# Altium PCB NBP7 Xilinx Virtex-II BGA456 Rev1.10.PcbDoc (part 3 of 3)
Units mm, origin at the board's own origin, x right, y up, seen from the top; angles counter-clockwise.
Board outline 69 x 80.99 mm, 6 copper layers (Top Layer, MidLayer1, InternalPlane1, InternalPlane2, MidLayer2, Bottom Layer); 101 components, 273 nets, 963 pads, 545 vias.
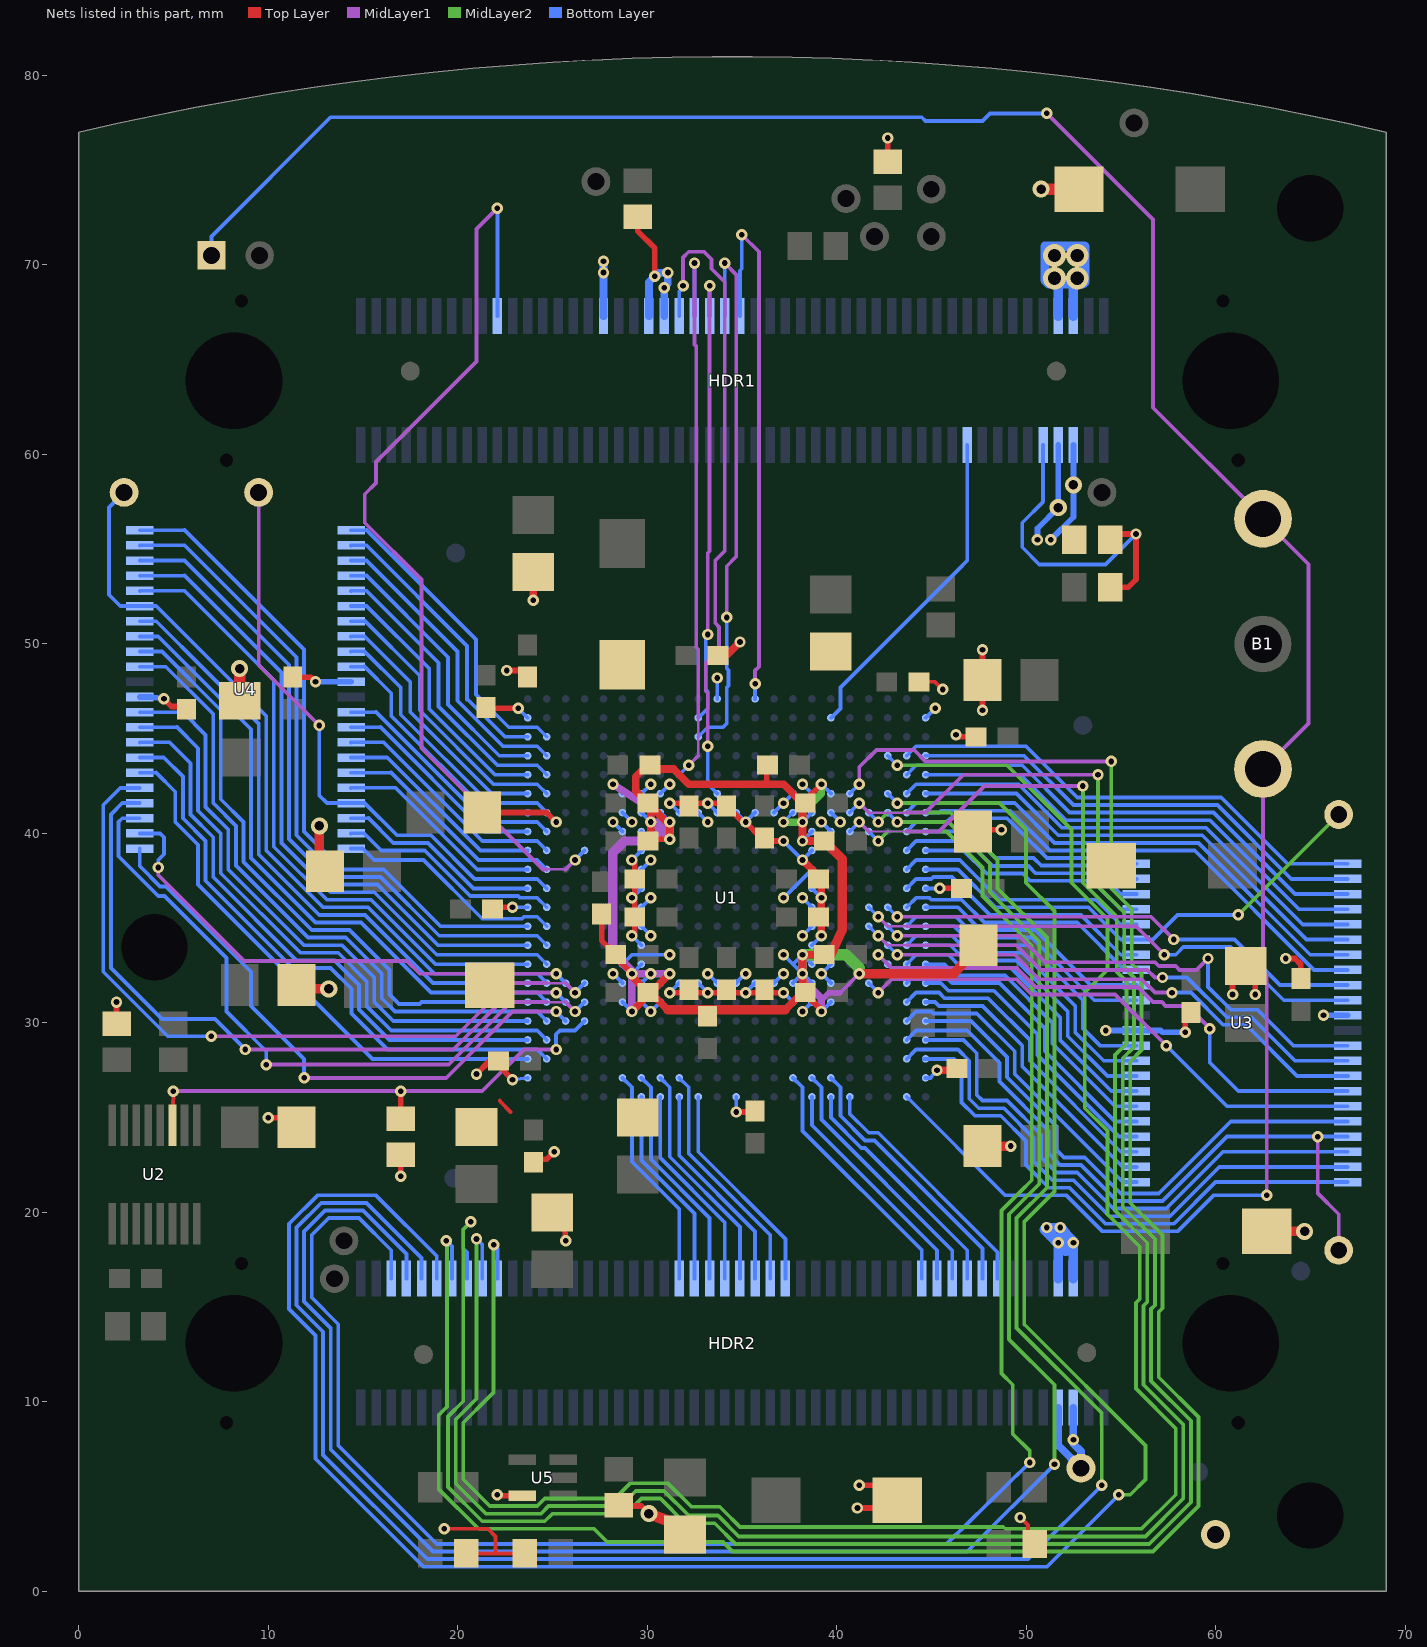
[diagram p7: the nets of this part, all layers, seen from the top]

## Via types
v1: diameter 0.6, hole 0.3, Top Layer to Bottom Layer, tented bottom, 520 vias
v2: diameter 0.9, hole 0.5, Top Layer to Bottom Layer, 17 vias
v3: diameter 1.2, hole 0.7, Top Layer to Bottom Layer, 8 vias

## Nets (pads, with @x,y where several pads share a name; then routed paths per layer and width w, separated by ;. In a path a pad name is that pad's centre, name@x,y a point inside that pad or via, vN(x,y) a via of type N, cw(c..) or ccw(c..) an arc to the next point about the centre after c; other vN are vias at no path point) (continued)
SP10: HDR2.86 U1.A18 | length 13.1
  Bottom Layer w0.2: U1.A18@40.7,26.1 40.7,25.2 41.7,24.2 42.2,24.2 48.5,17.9 HDR2.86@48.5,16.5
SP11: HDR2.84 U1.B17 | length 14.2
  Bottom Layer w0.2: U1.B17@39.7,27.1 40.2,26.6 40.2,25.1 41.5,23.8 42,23.8 47.7,18.1 HDR2.84@47.7,16.5
SP12: HDR2.82 U1.A17 | length 12.7
  Bottom Layer w0.2: U1.A17@39.7,26.1 39.7,25 41.3,23.4 41.5,23.4 46.9,18 HDR2.82@46.9,16.5
SP13: HDR2.80 U1.B16 | length 13.7
  Bottom Layer w0.2: U1.B16@38.7,27.1 39.2,26.6 39.2,24.9 46.1,18 HDR2.80@46.1,16.5
SP14: HDR2.78 U1.A16 | length 12.3
  Bottom Layer w0.2: U1.A16@38.7,26.1 38.7,24.6 45.3,18 HDR2.78@45.3,16.5
SP15: HDR2.76 U1.B15 | length 13.4
  Bottom Layer w0.2: U1.B15@37.7,27.1 38.2,26.6 38.2,24.3 44.5,18 HDR2.76@44.5,16.5
SPI_CLK: HDR1.46 U1.V9 | length 30.3
  MidLayer1 w0.127: 32.7,44.1 32.7,46.1
  MidLayer1 w0.2: v1(32.2,43.6) 32.7,44.1 ; v1(32.5,70.1) 32.5,65.8 32.6,65.7 32.6,49.8 32.7,49.7 32.7,46.1
  Bottom Layer w0.2: U1.V9@31.7,43.1 v1(32.2,43.6) ; HDR1.46@32.5,67.3 v1(32.5,70.1)
SPI_DIN: HDR1.44 U1.U11 | length 34.3
  MidLayer1 w0.2: v1(31.9,68.9) 31.9,70.4 32.2,70.7 33,70.7 33.4,70.3 33.4,69.8 34.1,69.1 34.1,54.9 33.6,54.4 33.6,51.1 33.8,50.9 33.8,49.7 33.1,49 33.1,47.5 33.2,47.4 v1(33.2,44.6)
  Bottom Layer w0.2: HDR1.44@31.7,67.3 31.7,68.6 31.9,68.8 v1(31.9,68.9) ; v1(33.2,44.6) 33.2,42.6 U1.U11@33.7,42.1
SPI_DOUT: HDR1.50 U1.Y10 | length 29.8
  MidLayer1 w0.2: v1(34.2,51.4) 34.2,54.1 34.7,54.6 34.7,69.5 v1@34.15,70.05 ; v1(34.1,70.1) v1@34.15,70.05 ; v1(34.1,70.1) 34.2,70.1 v1@34.15,70.05 ; v1(34.1,70.1) 34.1,70 v1@34.15,70.05
  Bottom Layer w0.2: U1.Y10@32.7,45.1 33.2,45.6 34,45.6 34.2,45.8 34.2,47.7 34.3,47.8 34.3,48.6 34.2,48.7 v1(34.2,51.4) ; HDR1.50@34.1,67.3 v1(34.1,70.1)
SPI_MODE: HDR1.52 U1.AB13 | length 29.4
  MidLayer1 w0.2: v1@34.9,71.6 34.95,71.65 v1(35,71.6) 35.9,70.7 35.9,48.8 35.7,48.6 v1(35.7,47.9)
  Bottom Layer w0.2: HDR1.52@34.9,67.3 34.9,69.7 35,69.8 v1(35,71.6) ; U1.AB13@35.7,47.1 v1(35.7,47.9)
SPI_SEL: HDR1.48 U1.AA10 | length 24.8
  MidLayer1 w0.2: v1(33.2,50.5) 33.2,54.8 33.3,54.9 v1(33.3,68.9)
  Bottom Layer w0.2: U1.AA10@32.7,46.1 33.2,46.6 33.2,47.5 33.1,47.6 33.1,50.5 v1(33.2,50.5) ; HDR1.48@33.3,67.3 v1(33.3,68.9)
SRAM0_A0: U1.G21 U3.5 | length 16.3
  Bottom Layer w0.2: U1.G21@43.7,32.1 44.2,32.6 45.6,32.6 46.1,32.1 48.6,32.1 51,29.7 51,28.5 54.7,24.8 U3.5@55.825,24.8
SRAM0_A1: U1.G22 U3.4 | length 15.1
  Bottom Layer w0.2: U1.G22@44.7,32.1 45.5,32.1 45.9,31.7 48.3,31.7 50.6,29.4 50.6,28.3 54.9,24 U3.4@55.825,24
SRAM0_A2: U1.F21 U3.3 | length 16.5
  Bottom Layer w0.2: U1.F21@43.7,31.1 44.2,31.6 45.4,31.6 45.7,31.3 48,31.3 50.2,29.1 50.2,28 55,23.2 U3.3@55.825,23.2
SRAM0_A3: U1.F22 U3.2 | length 15.4
  Bottom Layer w0.2: U1.F22@44.7,31.1 45.2,31.1 45.4,30.9 47.7,30.9 49.8,28.8 49.8,27.7 55.1,22.4 U3.2@55.825,22.4
SRAM0_A4: U1.E21 U3.1 | length 16.8
  Bottom Layer w0.2: U1.E21@43.7,30.1 44.2,30.6 45,30.6 45.1,30.5 47.4,30.5 49.4,28.5 49.4,27.3 55.1,21.6 U3.1@55.825,21.6
SRAM0_A5: U1.C22 U3.44 | length 28.7
  Bottom Layer w0.2: U1.C22@44.6,28.1 U1.C22@44.7,28.1 46.2,28.1 46.6,27.7 46.6,25.8 47.3,25.1 48.669,25.1 50,23.769 50,22.5 51.2,21.3 52.3,21.3 54.2,19.4 57.8,19.4 60,21.6 U3.44@66.975,21.6
SRAM0_A6: U1.C21 U3.43 | length 30.1
  Bottom Layer w0.2: U1.C21@43.7,28.1 44.2,28.6 46.4,28.6 47,28 47,26 47.5,25.5 48.834,25.5 50.4,23.934 50.4,22.7 51.4,21.7 52.5,21.7 54.4,19.8 57.6,19.8 60.2,22.4 U3.43@66.975,22.4
SRAM0_A7: U1.D22 U3.42 | length 29.2
  Bottom Layer w0.2: U1.D22@44.7,29.1 46.7,29.1 47.4,28.4 47.4,26.2 47.7,25.9 49,25.9 50.8,24.1 50.8,22.9 51.6,22.1 52.7,22.1 54.6,20.2 57.4,20.2 60.4,23.2 U3.42@66.975,23.2
SRAM0_A8: U1.N21 U3.18 | length 13.7
  Bottom Layer w0.2: U1.N21@43.7,38.1 44.2,38.6 46.5,38.6 48.6,36.5 53.7,36.5 55,35.2 U3.18@55.825,35.2
SRAM0_A9: U1.U21 U3.27 | length 26.5
  Bottom Layer w0.2: U1.U21@43.7,42.1 44.2,42.6 49.6,42.6 51.9,40.3 59.5,40.3 64.6,35.2 U3.27@66.975,35.2
SRAM0_A10: U1.V22 U3.26 | length 25.2
  Bottom Layer w0.2: U1.V22@44.7,43.1 49.7,43.1 52.1,40.7 59.7,40.7 64.4,36 U3.26@66.975,36
SRAM0_A11: U1.V21 U3.25 | length 26.3
  Bottom Layer w0.2: U1.V21@43.7,43.1 44.2,43.6 49.8,43.6 52.3,41.1 59.9,41.1 64.2,36.8 U3.25@66.975,36.8
SRAM0_A12: U1.W22 U3.24 | length 25
  Bottom Layer w0.2: U1.W22@44.7,44.1 49.9,44.1 52.5,41.5 60.1,41.5 64,37.6 U3.24@66.975,37.6
SRAM0_A13: U1.W21 U3.23 | length 26.1
  Bottom Layer w0.2: U1.W21@43.7,44.1 44.2,44.6 50,44.6 52.7,41.9 60.3,41.9 63.8,38.4 U3.23@66.975,38.4
SRAM0_A14: U1.R21 U3.22 | length 13.4
  Bottom Layer w0.2: U1.R21@43.7,40.1 44.2,40.6 ; 44.2,40.6 45.8,40.6 46,40.8 49,40.8 49.693,40.107 51.1,38.7 54.7,38.7 55,38.4 U3.22@55.825,38.4
SRAM0_A15: U1.R22 U3.21 | length 12.2
  Bottom Layer w0.2: U1.R22@44.7,40.1 47,40.1 48.4,38.7 50.4,38.7 50.8,38.3 54.3,38.3 55,37.6 U3.21@55.825,37.6
SRAM0_A16: U1.P21 U3.20 | length 13.5
  Bottom Layer w0.2: U1.P21@43.7,39.1 44.2,39.6 46.9,39.6 48.222,38.278 50.122,38.278 50.5,37.9 53.9,37.9 55,36.8 U3.20@55.825,36.8
SRAM0_A17: U1.P22 U3.19 | length 12.4
  Bottom Layer w0.2: U1.P22@44.7,39.1 46.7,39.1 47.922,37.878 49.822,37.878 50.2,37.5 53.5,37.5 55,36 U3.19@55.825,36
SRAM0_A18: U1.U22 U3.28 | length 25.5
  Bottom Layer w0.2: U1.U22@44.7,42.1 49.5,42.1 51.7,39.9 59.3,39.9 64.8,34.4 U3.28@66.975,34.4
SRAM0_D0: U1.H21 U3.7 | length 16
  Bottom Layer w0.2: U1.H21@43.7,33.1 44.2,33.6 45.9,33.6 46.6,32.9 49.2,32.9 51.8,30.3 51.8,29.1 54.5,26.4 U3.7@55.825,26.4
SRAM0_D1: U1.J22 U3.8 | length 14.7
  Bottom Layer w0.2: U1.J22@44.7,34.1 46,34.1 46.8,33.3 49.5,33.3 52.2,30.6 52.2,29.3 54.3,27.2 U3.8@55.825,27.2
SRAM0_D2: U1.J21 U3.9 | length 15.9
  Bottom Layer w0.2: U1.J21@43.7,34.1 44.2,34.6 46.1,34.6 47,33.7 49.8,33.7 52.6,30.9 52.6,29.5 54.1,28 U3.9@55.825,28
SRAM0_D3: U1.K22 U3.10 | length 14.6
  Bottom Layer w0.2: U1.K22@44.7,35.1 45.2,35.1 46.2,35.1 47.2,34.1 50.1,34.1 53,31.2 53,29.7 53.9,28.8 U3.10@55.825,28.8
SRAM0_D4: U1.K21 U3.13 | length 14.2
  Bottom Layer w0.2: U1.K21@43.7,35.1 44.2,35.6 46.3,35.6 47.4,34.5 50.3,34.5 53.6,31.2 U3.13@55.825,31.2
SRAM0_D5: U1.L22 U3.14 | length 12.8
  Bottom Layer w0.2: U1.L22@44.7,36.1 46.4,36.1 47.6,34.9 50.5,34.9 53.4,32 U3.14@55.825,32
SRAM0_D6: U1.L21 U3.15 | length 13.9
  Bottom Layer w0.2: U1.L21@43.7,36.1 44.2,36.6 44.9,36.6 45,36.5 46.6,36.5 47.8,35.3 52.7,35.3 55.2,32.8 U3.15@55.825,32.8
SRAM0_D7: U1.M21 U3.16 | length 14.1
  Bottom Layer w0.2: U1.M21@43.7,37.1 44.2,37.6 45,37.6 45.1,37.7 46.1,37.7 48.1,35.7 52.9,35.7 55,33.6 U3.16@55.825,33.6
SRAM0_D8: U1.T21 U3.29 | length 26.8
  Bottom Layer w0.2: U1.T21@43.7,41.1 44.2,41.6 49.4,41.6 51.5,39.5 59.1,39.5 65,33.6 U3.29@66.975,33.6
SRAM0_D9: U1.T22 U3.30 | length 25.8
  Bottom Layer w0.2: U1.T22@44.7,41.1 45.4,41.1 45.5,41.2 49.166,41.2 51.266,39.1 58.9,39.1 65.2,32.8 U3.30@66.975,32.8
SRAM0_D10: U1.L20 U3.31 | length 26
  MidLayer1 w0.2: v1(43.2,35.6) 56.6,35.6 v1(57.8,34.4)
  Bottom Layer w0.2: U1.L20@42.7,36.1 v1(43.2,35.6) ; v1(57.8,34.4) 61,34.4 63.4,32 U3.31@66.975,32
SRAM0_D11: U1.L19 U3.32 | length 27.6
  MidLayer1 w0.127: 42.7,35.1 43.7,35.1
  MidLayer1 w0.2: v1(42.2,35.6) 42.7,35.1 ; 43.7,35.1 55.8,35.1 v1(57.3,33.6)
  Bottom Layer w0.2: U1.L19@41.7,36.1 v1(42.2,35.6) ; v1(57.3,33.6) 57.9,33.6 58.3,34 60.8,34 63.6,31.2 U3.32@66.975,31.2
SRAM0_D12: U1.K20 U3.35 | length 28.3
  MidLayer1 w0.2: v1(43.2,34.6) 49.6,34.6 51,33.2 56.8,33.2 57,33 57.9,33 58.1,32.8 59,32.8 v1(59.6,33.4)
  Bottom Layer w0.2: U1.K20@42.7,35.1 v1(43.2,34.6) ; v1(59.6,33.4) 59.6,31.9 60.8,30.7 62.2,30.7 64.1,28.8 U3.35@66.975,28.8
SRAM0_D13: U1.K19 U3.36 | length 28.2
  MidLayer1 w0.127: 42.7,34.1 43.7,34.1
  MidLayer1 w0.2: v1(42.2,34.6) 42.7,34.1 ; 43.7,34.1 49.5,34.1 50.8,32.8 56.4,32.8 56.8,32.4 v1(57.2,32.4)
  Bottom Layer w0.2: U1.K19@41.7,35.1 v1(42.2,34.6) ; v1(57.2,32.4) 58.5,32.4 60.6,30.3 61.9,30.3 64.2,28 U3.36@66.975,28
SRAM0_D14: U1.J20 U3.37 | length 27.2
  MidLayer1 w0.2: v1(43.2,33.6) 49.4,33.6 50.7,32.3 56.1,32.3 56.8,31.6 v1(57.7,31.6)
  Bottom Layer w0.2: U1.J20@42.7,34.1 v1(43.2,33.6) ; v1(57.7,31.6) 58.7,31.6 60.4,29.9 61.6,29.9 64.3,27.2 U3.37@66.975,27.2 U3.37@67,27.2
SRAM0_D15: U1.H20 U3.38 | length 29.6
  MidLayer1 w0.2: v1(42.2,33.6) 42.9,32.9 49.5,32.9 ; 49.534,32.9 49.5,32.9 ; v1(59.7,29.7) 58.5,30.9 57.367,30.9 57.167,31.1 56.7,31.1 55.9,31.9 50.5,31.9 49.5,32.9
  Bottom Layer w0.2: v1(42.2,33.6) U1.H20@42.7,33.1 ; v1(59.7,29.7) 59.7,27.9 61.2,26.4 U3.38@66.975,26.4
SRAM0_E: U1.H22 U3.6 | length 14.9
  Bottom Layer w0.2: U1.H22@44.7,33.1 45.7,33.1 46.3,32.5 48.9,32.5 51.4,30 51.4,28.9 54.7,25.6 U3.6@55.825,25.6
SRAM0_LB: U1.G19 U3.39 | length 28.5
  MidLayer1 w0.2: v1(42.2,31.6) 42.9,32.3 49.5,32.3 50.3,31.5 54.7,31.5 v1(57.4,28.8)
  Bottom Layer w0.2: U1.G19@41.7,32.1 v1(42.2,31.6) ; v1(57.4,28.8) 58.4,27.8 60.6,25.6 U3.39@66.975,25.6
SRAM0_OE: TP13.1 U1.D21 U3.41 | length 36.4
  MidLayer1 w0.2: v1(65.4,24) 65.4,21 66.5,19.9 TP13.1@66.5,18
  Bottom Layer w0.2: U1.D21@43.7,29.1 44.2,29.6 46.9,29.6 48.6,27.9 48.6,26.9 51.2,24.3 51.2,23.1 51.8,22.5 52.9,22.5 54.8,20.6 57.2,20.6 60.6,24 v1(65.4,24) U3.41@66.975,24
SRAM0_UB: U1.E22 U3.40 | length 29
  Bottom Layer w0.2: U1.E22@44.7,30.1 47.1,30.1 49,28.2 49,27.134 51.6,24.534 51.6,23.3 52,22.9 53.1,22.9 55,21 57,21 60.8,24.8 U3.40@66.975,24.8
SRAM0_W: TP15.1 U1.N22 U3.17 | length 26.1
  MidLayer2 w0.2: v1(61.2,35.7) TP15.1@66.5,41
  Bottom Layer w0.2: U1.N22@44.7,38.1 46.4,38.1 48.4,36.1 53.3,36.1 55,34.4 U3.17@55.825,34.4 56.7,34.4 58,35.7 v1(61.2,35.7)
SRAM1_A0: U1.G4 U4.5 | length 39.5
  MidLayer1 w0.127: 24.7,32.1 25.7,32.1
  MidLayer1 w0.2: v1(7,29.3) 19.903,29.3 22.703,32.1 24.7,32.1 ; 25.7,32.1 v1(26.2,31.6)
  Bottom Layer w0.2: U4.5@3.225,42.4 2.2,42.4 1.3,41.5 1.3,32.7 4.2,29.8 4.7,29.3 v1(7,29.3) ; v1(26.2,31.6) U1.G4@26.7,32.1
SRAM1_A1: U1.F3 U4.4 | length 37.1
  MidLayer1 w0.2: v1(8.8,28.6) 19.769,28.6 22.769,31.6 v1(25.2,31.6)
  Bottom Layer w0.2: U4.4@3.225,41.6 2.3,41.6 1.7,41 1.7,32.9 4.4,30.2 7.2,30.2 v1(8.8,28.6) ; v1(25.2,31.6) U1.F3@25.7,31.1
SRAM1_A2: U1.F4 U4.3 | length 36
  MidLayer1 w0.127: 24.7,31.1 25.7,31.1
  MidLayer1 w0.2: v1(9.9,27.8) 19.534,27.8 22.834,31.1 24.7,31.1 ; 25.7,31.1 v1(26.2,30.6)
  Bottom Layer w0.2: U4.3@3.225,40.8 2.3,40.8 2.1,40.6 2.1,38.8 4.2,36.7 4.534,36.7 7.8,33.434 7.8,30.6 9.9,28.5 v1(9.9,27.8) ; v1(26.2,30.6) U1.F4@26.7,31.1
SRAM1_A3: U1.G3 U4.2 | length 27.3
  MidLayer1 w0.2: v1(4.2,38.2) 4.2,37.8 8.731,33.269 17.331,33.269 18,32.6 v1(25.2,32.6)
  Bottom Layer w0.2: U4.2@3.225,40 4.3,40 4.5,39.8 4.5,38.9 4.2,38.6 v1(4.2,38.2) ; v1(25.2,32.6) U1.G3@25.7,32.1
SRAM1_A4: U1.E3 U4.1 | length 31.3
  MidLayer1 w0.2: v1(11.9,27.1) 19.4,27.1 22.9,30.6 v1(25.2,30.6)
  Bottom Layer w0.2: U4.1@3.225,39.2 3.225,38.275 4.3,37.2 4.6,37.2 9.1,32.7 9.1,30.9 11.9,28.1 v1(11.9,27.1) ; v1(25.2,30.6) U1.E3@25.7,30.1
SRAM1_A5: U1.K2 U4.44 | length 12.1
  Bottom Layer w0.2: U4.44@14.375,39.2 14.99,39.21 15.6,38.6 18.203,38.6 21.303,35.5 23.4,35.5 23.5,35.6 24.2,35.6 U1.K2@24.7,35.1
SRAM1_A6: U1.L2 U4.43 | length 11.9
  Bottom Layer w0.2: U4.43@14.375,40 15.059,40.01 15.969,39.1 18.269,39.1 20.669,36.7 23.2,36.7 23.3,36.6 24.2,36.6 U1.L2@24.7,36.1
SRAM1_A7: U1.M1 U4.42 | length 10.9
  Bottom Layer w0.2: U4.42@14.375,40.8 15.29,40.81 16.6,39.5 18.434,39.5 20.834,37.1 U1.M1@23.7,37.1
SRAM1_A8: U1.H1 U4.18 | length 33.8
  Bottom Layer w0.2: U4.18@3.225,52.8 5.59,52.81 10.3,48.1 10.3,39.3 13.1,36.5 15.437,36.5 18.837,33.1 U1.H1@23.7,33.1
SRAM1_A9: U1.V2 U4.27 | length 15.7
  Bottom Layer w0.2: U4.27@14.375,52.8 15.19,52.81 18.996,49.004 18.996,46.704 22.1,43.6 24.2,43.6 U1.V2@24.7,43.1
SRAM1_A10: U1.W1 U4.26 | length 14.7
  Bottom Layer w0.2: U4.26@14.375,53.6 15.19,53.61 19.5,49.3 19.5,46.8 22.2,44.1 U1.W1@23.7,44.1
SRAM1_A11: U1.W2 U4.25 | length 16.1
  Bottom Layer w0.2: U4.25@14.375,54.4 15.19,54.41 20,49.6 20,47 22.4,44.6 24.2,44.6 U1.W2@24.7,44.1
SRAM1_A12: U1.Y1 U4.24 | length 15.2
  Bottom Layer w0.2: U4.24@14.375,55.2 15.19,55.21 20.5,49.9 20.5,47.1 ; 20.5,47.066 20.5,47.1 ; U1.Y1@23.7,45.1 22.5,45.1 20.517,47.083 20.5,47.1
SRAM1_A13: U1.Y2 U4.23 | length 16.5
  Bottom Layer w0.2: U4.23@14.375,56 15.19,56.01 20.968,50.232 20.968,47.332 22.7,45.6 24.2,45.6 U1.Y2@24.7,45.1
SRAM1_A14: U1.K1 U4.22 | length 34.8
  Bottom Layer w0.2: U4.22@3.225,56 5.59,56.01 6.2,55.4 11.9,49.7 11.9,40.1 13.9,38.1 16.1,38.1 19.1,35.1 U1.K1@23.7,35.1
SRAM1_A15: U1.J2 U4.21 | length 35.7
  Bottom Layer w0.2: U4.21@3.225,55.2 5.59,55.21 6.2,54.6 11.5,49.3 11.5,39.9 13.7,37.7 15.934,37.7 19.034,34.6 24.2,34.6 U1.J2@24.7,34.1
SRAM1_A16: U1.J1 U4.20 | length 34.3
  Bottom Layer w0.2: U4.20@3.225,54.4 5.59,54.41 6.2,53.8 11.1,48.9 11.1,39.7 13.5,37.3 15.769,37.3 16.369,36.7 18.969,34.1 U1.J1@23.7,34.1
SRAM1_A17: U1.H2 U4.19 | length 35.2
  Bottom Layer w0.2: U4.19@3.225,53.6 5.59,53.61 10.7,48.5 10.7,39.5 13.3,36.9 15.603,36.9 18.903,33.6 24.2,33.6 U1.H2@24.7,33.1
SRAM1_A18: U1.V1 U4.28 | length 14.3
  Bottom Layer w0.2: U4.28@14.375,52 15.19,52.01 18.5,48.7 18.5,46.566 21.966,43.1 U1.V1@23.7,43.1
SRAM1_D0: U1.C2 U4.7 | length 31.3
  Bottom Layer w0.2: U4.7@3.225,44 4.49,44.01 5.5,43 5.5,40.8 6.7,39.6 6.7,37.5 11.3,32.9 13.3,32.9 14.4,31.8 14.4,30.5 16.3,28.6 24.2,28.6 U1.C2@24.7,28.1
SRAM1_D1: U1.D1 U4.8 | length 30.6
  Bottom Layer w0.2: U4.8@3.225,44.8 4.79,44.81 5.9,43.7 5.9,41 7.1,39.8 7.1,37.7 11.5,33.3 13.5,33.3 14.8,32 14.8,30.7 16.4,29.1 U1.D1@23.7,29.1
SRAM1_D2: U1.D2 U4.9 | length 32.2
  Bottom Layer w0.2: U4.9@3.225,45.6 5.19,45.61 6.3,44.5 6.3,41.2 7.5,40 7.5,37.9 11.7,33.7 13.7,33.7 15.2,32.2 15.2,30.9 16.5,29.6 24.2,29.6 U1.D2@24.7,29.1
SRAM1_D3: U1.E1 U4.10 | length 31.4
  Bottom Layer w0.2: U4.10@3.225,46.4 5.5,46.4 6.7,45.2 6.7,41.4 7.9,40.2 7.9,38.1 11.9,34.1 13.9,34.1 15.6,32.4 15.6,31.1 16.6,30.1 U1.E1@23.7,30.1
SRAM1_D4: U1.E2 U4.13 | length 34
  Bottom Layer w0.2: U4.13@3.225,48.8 4.6,48.8 7.1,46.3 7.1,41.6 8.3,40.4 8.3,38.3 12.1,34.5 14.1,34.5 16,32.6 16,31.3 16.7,30.6 24.2,30.6 U1.E2@24.7,30.1
SRAM1_D5: U1.F1 U4.14 | length 33
  Bottom Layer w0.2: U4.14@3.225,49.6 4.4,49.6 7.5,46.5 7.5,41.8 8.7,40.6 8.7,38.5 12.3,34.9 14.3,34.9 16.4,32.8 16.4,31.5 16.9,31 18,31 18.1,31.1 U1.F1@23.7,31.1
SRAM1_D6: U1.F2 U4.15 | length 33.5
  Bottom Layer w0.2: U4.15@3.225,50.4 4.2,50.4 9.1,45.5 9.1,38.7 12.5,35.3 14.9,35.3 18.6,31.6 24.2,31.6 U1.F2@24.7,31.1
SRAM1_D7: U1.G1 U4.16 | length 32.4
  Bottom Layer w0.2: U4.16@3.225,51.2 4.1,51.2 6.7,48.6 9.5,45.8 9.5,38.9 12.7,35.7 15.106,35.7 18.706,32.1 U1.G1@23.7,32.1
SRAM1_D8: U1.U2 U4.29 | length 15.2
  Bottom Layer w0.2: U4.29@14.375,51.2 15.11,51.21 18,48.32 18,46.5 21.9,42.6 24.2,42.6 U1.U2@24.7,42.1
SRAM1_D9: U1.U1 U4.30 | length 13.7
  Bottom Layer w0.2: U4.30@14.375,50.4 15.09,50.41 17.5,48 17.5,46.4 21.8,42.1 U1.U1@23.7,42.1
SRAM1_D10: U1.T2 U4.31 | length 14.7
  Bottom Layer w0.2: U4.31@14.375,49.6 15.09,49.61 17,47.7 17,46.266 21.666,41.6 24.2,41.6 U1.T2@24.7,41.1
SRAM1_D11: U1.T1 U4.32 | length 13.2
  Bottom Layer w0.2: U4.32@14.375,48.8 15.09,48.81 16.5,47.4 16.5,46.2 21.6,41.1 U1.T1@23.7,41.1
SRAM1_D12: U1.R2 U4.35 | length 12.9
  Bottom Layer w0.2: U4.35@14.375,46.4 15.69,46.41 21.5,40.6 24.2,40.6 U1.R2@24.7,40.1
SRAM1_D13: U1.R1 U4.36 | length 11.6
  Bottom Layer w0.2: U4.36@14.375,45.6 15.925,45.61 21.434,40.1 U1.R1@23.7,40.1
SRAM1_D14: U1.P2 U4.37 | length 12.7
  Bottom Layer w0.2: U4.37@14.375,44.8 16.09,44.81 21.3,39.6 24.2,39.6 U1.P2@24.7,39.1
SRAM1_D15: U1.P1 U4.38 | length 11.4
  Bottom Layer w0.2: U4.38@14.375,44 16.29,44.01 21.2,39.1 U1.P1@23.7,39.1
SRAM1_E: U1.C1 U4.6 | length 28.9
  Bottom Layer w0.2: U4.6@3.225,43.2 4.09,43.21 5.1,42.2 5.1,40.6 6.3,39.4 6.3,37.3 15.5,28.1 U1.C1@23.7,28.1
SRAM1_LB: U1.N2 U4.39 | length 12.4
  Bottom Layer w0.2: U4.39@14.375,43.2 16.49,43.21 21.1,38.6 24.2,38.6 U1.N2@24.7,38.1
SRAM1_OE: TP14.1 U1.M2 U4.41 | length 31.4
  MidLayer1 w0.2: TP14.1@9.5,58 9.5,48.9 v1(12.7,45.7)
  Bottom Layer w0.2: v1(12.7,45.7) 12.7,42 13.1,41.6 U4.41@14.375,41.6 15.09,41.61 16.8,39.9 18.6,39.9 20.9,37.6 24.2,37.6 U1.M2@24.7,37.1
SRAM1_UB: U1.N1 U4.40 | length 11.1
  Bottom Layer w0.2: U4.40@14.375,42.4 16.725,42.41 21.034,38.1 U1.N1@23.7,38.1
SRAM1_W: TP12.1 U1.G2 U4.17 | length 41.5
  Bottom Layer w0.2: TP12.1@2.4,58 1.6,57.2 1.6,52.6 2.2,52 U4.17@3.225,52 4.1,52 9.9,46.2 9.9,39.1 12.9,36.1 15.272,36.1 15.972,35.4 18.772,32.6 24.2,32.6 U1.G2@24.7,32.1
SW0: HDR2.44 U1.B6 | length 11.8
  Bottom Layer w0.2: U1.B6@28.7,27.1 29.2,26.6 29.2,22.672 31.7,20.172 HDR2.44@31.7,16.5
SW1: HDR2.46 U1.A7 | length 10.8
  Bottom Layer w0.2: U1.A7@29.7,26.1 29.7,22.737 32.5,19.937 HDR2.46@32.5,16.5
SW2: HDR2.48 U1.B7 | length 12.1
  Bottom Layer w0.2: U1.B7@29.7,27.1 30.2,26.6 30.2,22.803 33.3,19.703 HDR2.48@33.3,16.5
SW3: HDR2.50 U1.A8 | length 11
  Bottom Layer w0.2: U1.A8@30.7,26.1 30.7,22.869 34.1,19.469 HDR2.50@34.1,16.5
SW4: HDR2.52 U1.B8 | length 12.3
  Bottom Layer w0.2: U1.B8@30.7,27.1 31.2,26.6 31.2,22.934 34.9,19.234 HDR2.52@34.9,16.5
SW5: HDR2.54 U1.A9 | length 11.3
  Bottom Layer w0.2: U1.A9@31.7,26.1 31.7,23 35.7,19 HDR2.54@35.7,16.5
SW6: HDR2.56 U1.B9 | length 12.6
  Bottom Layer w0.2: U1.B9@31.7,27.1 32.2,26.6 32.2,23.1 36.5,18.8 HDR2.56@36.5,16.5
SW7: HDR2.58 U1.A10 | length 11.5
  Bottom Layer w0.2: U1.A10@32.7,26.1 32.7,23.2 37.3,18.6 HDR2.58@37.3,16.5
SWC0: HDR2.18 U1.R18 | length 111.1
  MidLayer1 w0.127: 41.7,40.1 43.7,40.1
  MidLayer1 w0.2: v1(41.2,40.6) 41.7,40.1 ; 43.7,40.1 45.4,40.1 47.8,42.5 v1(53,42.5)
  MidLayer2 w0.2: v1(21,18.6) 21,10.166 19.9,9.066 19.9,5.7 21.5,4.1 24.4,4.1 24.8,4.5 28.6,4.5 29.4,5.3 30.9,5.3 32.2,4 33.734,4 34.834,2.9 56.3,2.9 58.3,4.9 58.3,8.8 56.2,10.9 56.2,15.069 56.4,15.269 56.4,18.4 54.7,20.1 54.7,24.5 54.7,28.3 55.3,28.9 55.3,32.2 54.781,32.719 54.781,35.619 53,37.4 v1(53,42.5)
  Bottom Layer w0.2: v1(21,18.6) 21.3,18.3 HDR2.18@21.3,16.5 ; U1.R18@40.7,40.1 v1(41.2,40.6)
SWC1: HDR2.16 U1.T18 | length 115.5
  MidLayer1 w0.127: 41.7,41.1 43.7,41.1
  MidLayer1 w0.2: v1(41.2,41.6) 41.7,41.1 ; 43.7,41.1 44.7,41.1 46.7,43.1 v1(53.8,43.1)
  MidLayer2 w0.2: v1(20.7,19.5) 20.3,19.1 20.3,10.031 19.5,9.231 19.5,5.5 21.3,3.7 24.6,3.7 25,4.1 28.9,4.1 29.7,4.9 30.7,4.9 32.005,3.595 33.574,3.595 34.669,2.5 56.5,2.5 58.7,4.7 58.7,9 56.6,11.1 56.6,14.903 56.8,15.103 56.8,18.6 55.1,20.3 55.1,28.134 55.7,28.734 55.7,32.4 55.181,32.919 55.181,35.819 53.8,37.2 v1(53.8,43.1)
  Bottom Layer w0.2: HDR2.16@20.5,16.5 20.5,17.9 20.3,18.1 20.3,19.1 v1(20.7,19.5) ; U1.T18@40.7,41.1 v1(41.2,41.6)
SWC2: HDR2.14 U1.U18 | length 115.3
  MidLayer1 w0.2: v1(41.2,42.6) 41.2,43.5 42.1,44.4 44.1,44.4 44.7,43.8 v1(54.5,43.8)
  MidLayer2 w0.2: v1(19.4,18.5) 19.446,18.454 19.446,9.743 19,9.297 19,5.4 21.1,3.3 27.2,3.3 27.9,2.6 34.003,2.6 34.503,2.1 56.7,2.1 59.1,4.5 59.1,9.2 57,11.3 57,14.737 57.2,14.937 57.2,18.8 55.5,20.5 55.5,27.969 56.1,28.569 56.1,32.6 55.581,33.119 55.581,36.019 54.5,37.1 v1(54.5,43.8)
  Bottom Layer w0.2: v1(19.4,18.5) 19.7,18.2 HDR2.14@19.7,16.5 ; U1.U18@40.7,42.1 v1(41.2,42.6)
SWC3: HDR2.6 U1.R19 | length 99.8
  MidLayer2 w0.127: 42.7,40.1 43.7,40.1
  MidLayer2 w0.2: v1(42.2,39.6) 42.7,40.1 ; 43.7,40.1 45.8,40.1 47.7,38.2 47.7,36.7 50.3,34.1 50.3,21.7 49.7,21.1 48.7,20.1 48.7,11.5 49.3,10.9 49.3,8.3 50.2,7.4 v1(50.2,6.8)
  Bottom Layer w0.2: HDR2.6@16.5,16.5 16.5,18 14.8,19.7 13.2,19.7 12.3,18.8 12.3,15.5 13.7,14.1 13.7,7.7 18.9,2.5 45.8,2.5 v1(50.2,6.8) ; U1.R19@41.7,40.1 v1(42.2,39.6)
SWR0: HDR2.20 U1.W20 | length 105.2
  MidLayer2 w0.2: 21.599,10.199 20.3,8.9 20.3,5.9 21.7,4.5 24.2,4.5 24.6,4.9 28.3,4.9 29.1,5.7 31.1,5.7 32.336,4.464 33.836,4.464 33.993,4.307 34.9,3.4 48.8,3.4 48.9,3.3 56.1,3.3 57.9,5.1 57.9,8.6 55.8,10.7 55.8,15.234 56,15.434 56,18.2 54.3,19.9 54.3,24.3 54.211,24.389 53.1,25.5 53.1,31.603 54.3,32.803 54.3,35.5 52.4,37.4 52.4,40.2 49,43.6 v1(43.2,43.6) ; 21.6,10.197 21.9,10.497 v1(21.9,18.3)
  Bottom Layer w0.2: v1(21.9,18.3) 22.1,18.1 HDR2.20@22.1,16.5 ; U1.W20@42.7,44.1 v1(43.2,43.6)
SWR1: HDR2.12 U1.U20 | length 118.3
  MidLayer2 w0.2: v1(43.2,41.6) 48.6,41.6 50,40.2 50,37.4 51.5,35.9 51.5,21.1 49.9,19.5 49.9,14.066 49.934,14.066 56.3,7.7 56.3,5.9 55.5,5.1 v1(54.9,5.1)
  Bottom Layer w0.2: HDR2.12@18.9,16.5 18.9,17.7 15.7,20.9 12.6,20.9 11.1,19.4 11.1,14.9 12.5,13.5 12.5,7 18.2,1.3 51.1,1.3 v1(54.9,5.1) ; U1.U20@42.7,42.1 v1(43.2,41.6)
SWR2: HDR2.10 U1.T19 | length 111.9
  MidLayer2 w0.127: 42.7,41.1 43.7,41.1
  MidLayer2 w0.2: v1(42.2,40.6) 42.7,41.1 ; 43.7,41.1 46,41.1 48.5,38.6 48.5,37.1 51.1,34.5 51.1,21.3 49.5,19.7 49.5,13.9 54,9.4 v1(54,5.6)
  Bottom Layer w0.2: HDR2.10@18.1,16.5 18.1,17.6 15.2,20.5 12.8,20.5 11.5,19.2 11.5,15.1 12.9,13.7 12.9,7.2 18.4,1.7 50.1,1.7 v1(54,5.6) ; U1.T19@41.7,41.1 v1(42.2,40.6)
SWR3: HDR2.8 U1.T20 | length 103.5
  MidLayer2 w0.2: v1(43.2,40.6) 45.9,40.6 48.1,38.4 48.1,36.9 50.7,34.3 50.7,21.5 49.1,19.9 49.1,13.3 51.5,10.9 v1(51.5,6.7)
  Bottom Layer w0.2: HDR2.8@17.3,16.5 17.3,17.8 15,20.1 13,20.1 11.9,19 11.9,15.3 13.3,13.9 13.3,7.5 18.7,2.1 46.9,2.1 v1(51.5,6.7) ; U1.T20@42.7,41.1 v1(43.2,40.6)
TEMP_ALERT: R13.2 U1.E4 U2.11 | length 27
  Top Layer w0.2: U2.11@4.952,24.6 v1(5,26.4)
  Top Layer w0.3: R13.2@17,24.95 v1(17,26.4)
  MidLayer1 w0.2: v1(5,26.4) v1(17,26.4) 21.3,26.4 23.5,28.6 v1(25.2,28.6)
  Bottom Layer w0.2: v1(25.2,28.6) 25.2,29.4 25.4,29.6 26.2,29.6 U1.E4@26.7,30.1
TEST: HDR1.81 U1.AA17 | length 17.4
  Bottom Layer w0.2: U1.AA17@39.7,46.1 40.2,46.6 40.2,47.7 46.4,53.9 46.9,54.4 HDR1.81@46.9,60.5
VBATT: B1.0 B1.1 JP1.1 U1.A21 | length 134.6
  MidLayer1 w0.2: v1(51.1,78) 56.7,72.4 56.7,62.466 62.5,56.666 B1.1@62.5,56.604 64.9,54.204 64.9,45.796 B1.0@62.5,43.396 62.5,32.7 62.7,32.5 v1(62.7,20.9)
  Bottom Layer w0.2: JP1.1@7.012,70.507 7.012,71.512 13.3,77.8 44.5,77.8 44.7,77.6 47.7,77.6 48.1,78 v1(51.1,78) ; U1.A21@43.7,26.1 48.9,20.9 52.134,20.9 54.034,19 58,19 59.9,20.9 v1(62.7,20.9)
  Bottom Layer w0.3: JP1.1@7,70.519 JP1.1@7.012,70.507
VCC: C1.1 C2.1 C7.1 C8.1 C9.1 C10.1 C11.1 C12.1 C13.1 C14.1 C15.1 C16.1 C17.1 C18.1 C19.1 C20.1 C22.1 C23.1 C24.1 C25.1 C26.1 C27.1 C28.1 C29.1 C30.1 C31.1 C32.1 C33.1 C34.1 C35.1 C36.1 C37.1 C38.1 C39.1 C40.1 C41.1 C42.1 C52.1 C56.1 C57.1 C58.1 HDR1.34 HDR1.40 HDR1.42 HDR1.94 HDR1.96 HDR2.94 HDR2.96 R4.1 R5.2 R6.1 R7.2 R11.2 R12.2 R13.1 TP10.1 U1.A12 U1.AA1 U1.AA22 U1.AB11 U1.B1 U1.B22 U1.F7 U1.F8 U1.F15 U1.F16 U1.G6 U1.G9 U1.G10 U1.G11 U1.G12 U1.G13 U1.G14 U1.G17 U1.H6 U1.H17 U1.J7 U1.J16 U1.K7 U1.K16 U1.L1 U1.L7 U1.L16 U1.M7 U1.M16 U1.M22 U1.N7 U1.N16 U1.P7 U1.P16 U1.R6 U1.R17 U1.T6 U1.T9 U1.T10 U1.T11 U1.T12 U1.T13 U1.T14 U1.T17 U1.U7 U1.U8 U1.U15 U1.U16 U3.11 U3.33 U4.11 U4.33 U5.5 | length 171.4
  Top Layer w0.2: v1(19.3,3.3) 21.6,3.3 22,2.9 22,2 ; R12.2@20.45,2 22,2 ; R7.2@23.55,2 22,2 ; C22.1@44.35,48 45.2,48 v1(45.6,47.6) ; v1(49.7,3.9) 50.1,3.5 50.1,3.1 50.359,3.137 50.45,3.15 R11.2@50.45,2.5
  Top Layer w0.3: R4.1@2,30 v1(2,31.1) ; v1(4.5,47.1) 4.9,46.7 C41.1@5.6,46.7 ; v1(10,25) C9.1@11.5,25 ; C42.1@11.3,48.25 12.25,48.25 v1(12.5,48) ; v1(17,21.9) R13.1@17,23.05 ; v1(21,27.3) 21.7,28 C38.1@22.15,28 22.15,27.75 v1(22.9,27) ; C11.1@21.3,41.1 24.7,41.1 v1(25.2,40.6) ; C24.1@21.55,46.6 v1(23.2,46.6) ; C28.1@21.9,36.1 v1(22.9,36.1) ; v1(22.1,5.1) 22.159,5.041 U5.5@23.42,5.041 ; v1(22.6,48.6) 23.2,48.6 C23.1@23.6,48.2 ; C27.1@24,22.8 24.7,22.8 v1(25.1,23.2) ; C14.1@25.6,19.8 v1(25.7,18.5) ; C52.1@28.5,4.55 29.1,4.5 29.7,4.5 v2(30.1,4.1) ; v1@29.1,36.7 v1(29.2,36.6) ; v1(29.2,34.6) 29.35,34.75 C32.1@29.35,35.6 29.35,36.45 v1(29.2,36.6) ; v1(29.2,38.6) 29.35,38.45 C37.1@29.35,37.6 29.35,36.75 v1(29.2,36.6) ; R5.2@29.5,72.55 29.5,71.8 30.4,70.9 v1(30.4,69.4) ; v1(31.2,31.6) 32.2,31.6 v1(33.2,31.6) 34.2,31.6 v1(35.2,31.6) 36.2,31.6 v1(37.2,31.6) ; v1(31.2,41.6) 32.2,41.6 v1(33.2,41.6) 34.2,41.6 C25.1@34.3,41.6 ; C25.1@34.2,41.45 35.05,40.6 v1(35.2,40.6) ; v1(34.7,25.3) C17.1@35.7,25.3 ; v1(35.2,40.6) C19.1@36,39.8 ; C19.1@36.2,39.6 v1(37.2,39.6) ; v1(41.1,4.4) 42.4,4.4 C56.1@42.8,4.5 ; v1(41.2,5.6) C56.1@43.1,5.6 ; R6.1@42.7,75.45 v1(42.7,76.7) ; v1(45.45,37.1) C29.1@46.6,37.1 ; v1(46.3,45.2) 46.2,45.1 46.3,45.1 C34.1@47.35,45.1 ; C16.1@47.2,40.2 v1(48.7,40.2) ; v1(47.7,49.7) C13.1@47.7,48.1 v1(47.7,46.5) ; v1(58.4,29.5) 58.4,30.55 C33.1@58.7,30.55 ; v1(60.9,31.5) C2.1@60.9,32.5 ; v1(62.1,31.5) C2.1@62.1,32.7 ; v1(63.7,33.4) 64.2,33.4 64.5,33.1 C18.1@64.5,32.35 ; v1(47.7,46.5) 47.7,46.4 v1(47.7,46.5)
  Top Layer w0.4: v1(24,52.3) C12.1@24,53.8 ; C35.1@33.75,49.4 34.2,49.4 v1(34.9,50.1) ; v1(38.2,38.6) 39.125,37.675 39.2,37.6 v1(39.2,36.6) 39.2,35.6 v1(39.2,34.6) ; v1(45.3,27.5) C39.1@46.3,27.5
  Top Layer w0.5: C8.1@11.5,31.8 v2(13.2,31.8) ; v2(12.7,40.4) 12.7,38.6 12.926,37.991 C10.1@12.9,38 ; C15.1@47.8,23.5 v1(49.2,23.5) ; C57.1@62.7,19 v2(64.7,19)
  Top Layer w0.6: C7.1@8.5,47 v2(8.5,48.7) ; v2(30.1,4.1) 31.7,3.5 31.4,3.4 31.6,3.2 31.758,2.88 31.878,2.637 31.89,2.633 C1.1@32,2.6 ; v2(50.8,74) C58.1@52.8,74
  Bottom Layer w0.2: v1(22.9,27) U1.B1@23.7,27.1 ; v1(22.9,36.1) U1.L1@23.7,36.1 ; v1(23.2,46.6) U1.AA1@23.7,46.1 ; v1(28.2,32.6) U1.G6@28.7,32.1 ; v1(28.2,40.6) U1.R6@28.7,40.1 ; U1.H6@28.7,33.1 29.2,33.6 v1(31.2,33.6) ; U1.T6@28.7,41.1 v1(29.2,40.6) ; v1(29.2,34.6) U1.J7@29.7,34.1 ; v1(29.2,36.6) U1.M7@29.7,37.1 ; v1(29.2,38.6) U1.P7@29.7,39.1 ; U1.F7@29.7,31.1 v1(30.2,30.6) U1.F8@30.7,31.1 ; U1.K7@29.7,35.1 v1(30.2,34.6) ; U1.L7@29.7,36.1 v1(30.2,36.6) ; U1.N7@29.7,38.1 v1(30.2,38.6) ; U1.U7@29.7,42.1 v1(30.2,42.6) ; U1.U8@30.7,42.1 v1(31.2,42.6) ; v1(31.2,31.6) U1.G9@31.7,32.1 ; v1(31.2,41.6) U1.T9@31.7,41.1 ; U1.G10@32.7,32.1 v1(33.2,31.6) ; U1.T10@32.7,41.1 v1(33.2,40.6) ; v1(33.2,32.6) U1.G11@33.7,32.1 ; v1(33.2,41.6) U1.T11@33.7,41.1 ; v1(33.7,48.2) U1.AB11@33.7,47.1 ; v1(34.7,25.3) U1.A12@34.7,26.1 ; U1.G12@34.7,32.1 v1(35.2,32.6) v1@35.2,32.7 ; U1.T12@34.7,41.1 v1(35.2,40.6) U1.T13@35.7,41.1 ; v1(35.2,31.6) U1.G13@35.7,32.1 ; U1.G14@36.7,32.1 v1(37.2,32.6) ; U1.T14@36.7,41.1 v1(37.2,41.6) U1.U15@37.7,42.1 ; v1(37.2,31.6) U1.F15@37.7,31.1 ; v1(37.2,36.6) U1.N16@38.7,38.1 ; v1(37.2,39.6) v1(38.2,38.6) U1.P16@38.7,39.1 ; v1(38.2,30.6) U1.F16@38.7,31.1 ; v1(38.2,34.6) U1.K16@38.7,35.1 ; v1(38.2,36.6) U1.L16@38.7,36.1 ; v1(38.2,42.6) U1.U16@38.7,42.1 ; U1.J16@38.7,34.1 v1(39.2,34.6) ; U1.M16@38.7,37.1 v1(39.2,36.6) ; v1(39.2,40.6) U1.R17@39.7,40.1 ; U1.G17@39.7,32.1 v1(39.2,32.6) U1.H17@39.7,33.1 ; U1.T17@39.7,41.1 v1(40.2,40.6) ; U1.B22@44.7,27.1 44.95,27.1 v1(45.3,27.5) ; U1.M22@44.7,37.1 v1(45.45,37.1) ; U1.AA22@44.7,46.1 v1(45.2,46.6)
  Bottom Layer w0.3: U4.11@3.225,47.2 3.8,47.2 v1(4.5,47.1) ; v1(12.5,48) U4.33@14.375,48 ; v1(54.2,29.6) 54.6,29.6 U3.11@55.825,29.6 57.1,29.6 57.2,29.5 v1(58.4,29.5) ; U3.11@55.9,29.6 U3.11@55.925,29.6 ; v1(65.7,30.4) 65.8,30.4 U3.33@66.975,30.4
  Bottom Layer w0.4: HDR1.34@27.7,67.3 v1(27.7,69.6) v1(27.7,70.2) ; HDR1.40@30.1,67.3 30.1,69.1 v1(30.4,69.4) 30.6,69.6 v1(31.1,69.6) 31.1,69 v1(30.9,68.8) HDR1.42@30.9,67.3
  Bottom Layer w0.5: v1(51.1,19.2) v1(51.8,19.2) v1@51.7,19.2 ; v3(51.5,69.3) 51.7,69.1 v3@51.7,69 ; HDR2.94@51.7,16.5 v1(51.7,18.4) ; HDR1.94@51.7,67.3 v3@51.7,69 ; HDR2.96@52.5,16.5 v1(52.5,18.4) ; HDR1.96@52.5,67.3 v3@52.5,69 ; v3(52.7,69.3) 52.5,69.1 v3@52.5,69 ; v3@51.7,69 v3@52.5,69 ; v3@51.7,69 51.5,69 51.2,69 51,69.2 51,69.3 51,70.5 51,71 51.5,71 52.7,71 53.1,71 53.1,70.5 53.1,69.3 53.1,69.1 53,69 52.7,69 v3@52.5,69
  Bottom Layer w0.6: v1(51.1,19.2) 51,19.1 51.3,18.8 v1(51.7,18.4) 52.1,18.4 ; v1(51.8,19.2) 52.1,18.8 v1(52.5,18.4) 52.1,18.4 ; 52.1,18 52.1,18.4
  other v3: 51.5,70.5 52.7,70.5
VCCINT: C3.1 C4.1 C5.1 C6.1 C43.1 C44.1 C45.1 C46.1 C47.1 C48.1 C49.1 C50.1 C53.1 C54.1 C55.1 C59.1 C60.1 C61.1 C62.1 HDR1.93 HDR1.95 HDR2.93 HDR2.95 R8.1 TP11.1 U1.F6 U1.F17 U1.G7 U1.G8 U1.G15 U1.G16 U1.H7 U1.H16 U1.R7 U1.R16 U1.T7 U1.T8 U1.T15 U1.T16 U1.U6 U1.U17 | length 138.8
  Top Layer w0.2: C43.1@28.35,33.6 28.35,33.45 v1(29.2,32.6) ; v1(29.2,30.6) 29.2,30.75 C50.1@30.05,31.6 C50.1@30.1,31.6 ; 37.2,42.7 38.3,41.6 C44.1@38.35,41.6 ; C48.1@38.3,31.6 C48.1@38.35,31.6 38.35,31.548 38.35,31.5 38.35,31.45 v1(39.2,30.6)
  Top Layer w0.203: 22.227,25.902 22.227,25.873 22.8,25.3
  Top Layer w0.3: C59.1@27.6,35.7 27.6,34.35 C43.1@28.35,33.6 28.2,33.6 28.275,33.525 v1(29.2,32.6) ; C50.1@30.05,31.6 30.1,31.6 C50.1@30.2,31.6 ; C45.1@30.1,39.7 30.2,39.7 v1(31.2,39.7) ; C60.1@36.35,43.6 36.3,42.6 36.7,42.6 ; C48.1@38.35,31.5 39.2,30.65 v1(39.2,30.6) ; C48.1@38.35,31.6 38.35,31.548 v1@39.2,30.698 ; C44.1@38.4,41.8 v1(39.2,42.6)
  Top Layer w0.4: v1(29.2,30.6) 30.1,31.5 C50.1@30.1,31.6 ; v1(29.2,32.6) 29.2,32.45 C50.1@30.05,31.6 C50.1@30.1,31.6 ; C49.1@30,41.5 30,41.6 C49.1@30,41.65 ; C49.1@30,41.7 C49.1@30,41.65 ; C45.1@30.2,39.7 v1(30.2,40.6) C49.1@30.2,41.45 ; C49.1@30.2,41.6 C49.1@30.2,41.45 ; 31.1,30.7 C50.1@30.2,31.6 ; v1(31.2,32.6) C50.1@30.2,31.6 ; v1(31.2,39.7) v1(31.2,40.6) 31.05,40.6 C49.1@30.2,41.45 ; 37.3,30.7 38.2,31.6 v1(38.2,32.6) v1(38.2,33.6) C47.1@39.35,33.6 ; C44.1@38.2,41.3 v1(38.2,40.6) v1(38.2,39.6) C46.1@39.35,39.6 ; C44.1@38.2,41.6 37.2,42.6 36.3,42.6 32.2,42.6 31.4,43.4 30.15,43.4 29.8,43.4 29.4,43 29.4,42.25 C49.1@30,41.65 ; C49.1@30,41.65 C49.1@30.05,41.6 C49.1@30.2,41.45 ; C50.1@30.1,31.6 C50.1@30.2,31.6
  Top Layer w0.5: 31.1,30.7 33.2,30.7 37.3,30.7 ; C47.1@39.35,33.6 39.7,33.6 40.3,34.9 40.3,38.65 C46.1@39.35,39.6 ; v1(41.2,32.6) 46.2,32.6 C6.1@47.5,34.1
  MidLayer1 w0.2: 40.2,31.6 v1(41.2,32.6)
  MidLayer1 w0.3: 39.2,31.2 39.6,31.6 40.2,31.6
  MidLayer1 w0.4: v1(28.2,42.6) 30.2,41.3 v1(30.2,40.6) v1@30.3,40.6 ; v1(29.2,30.6) v1(29.2,32.6) 29.3,32.6 v1(30.2,32.6) v1(31.2,32.6) ; v1(38.2,33.6) v1(38.2,32.6) 38.2,32.3 39.2,31.3 39.2,31.2 v1(39.2,30.6) ; v1@30.3,40.6 31.2,40.6 v1(31.2,39.7) 30.75,40.15 v1@30.3,40.6
  MidLayer1 w0.5: v1@29.3,32.6 29.25,32.65 28.2,33.7 28.2,39 28.8,39.6 30.2,39.6 30.75,40.15 v1@31.2,40.6
  MidLayer2 w0.4: v1(29.2,30.6) v1(29.2,32.6) v1(30.2,32.6) v1(31.2,32.6) ; v1(30.2,40.6) v1(31.2,40.6) v1(31.2,39.7) ; v1(37.2,40.6) v1(38.2,40.6) 38.2,41.1 39.2,42.1 v1(39.2,42.6) ; v1(38.2,32.6) v1(38.2,33.6)
  MidLayer2 w0.6: v1(38.2,33.6) 40.5,33.6 41.2,32.9 v1(41.2,32.6)
  Bottom Layer w0.2: v1(28.2,42.6) U1.U6@28.7,42.1 ; U1.F6@28.7,31.1 v1(29.2,30.6) ; v1(29.2,32.6) U1.H7@29.7,33.1 ; U1.G7@29.7,32.1 v1(30.2,32.6) ; U1.R7@29.7,40.1 30.1,39.7 v1(31.2,39.7) ; U1.T7@29.7,41.1 v1(30.2,40.6) ; U1.G8@30.7,32.1 v1(31.2,32.6) ; U1.T8@30.7,41.1 v1(31.2,40.6) ; v1(37.2,33.6) 37.7,33.1 ; v1(37.2,40.6) 37.45,40.85 U1.T15@37.7,41.1 ; U1.G15@37.7,32.1 v1(38.2,32.6) ; v1(38.2,39.6) U1.R16@38.7,40.1 ; v1(38.2,40.6) U1.T16@38.7,41.1 ; U1.G16@38.7,32.1 v1(38.2,32.6) ; U1.H16@38.7,33.1 v1(38.2,33.6) 37.7,33.1 ; v1(39.2,30.6) U1.F17@39.7,31.1 ; v1(39.2,42.6) U1.U17@39.7,42.1 ; 37.7,33.1 v1(38.2,32.6)
  Bottom Layer w0.3: v1(50.6,55.5) 50.6,56.1 v2(51.7,57.2) HDR1.93@51.7,60.5 ; v1(51.3,55.5) 52.5,56.7 v2(52.5,58.4) HDR1.95@52.5,60.5
  Bottom Layer w0.4: HDR2.93@51.7,9.7 51.7,7.7 TP11.1@52.9,6.5 52.9,7.4 52.5,7.8 v1(52.5,8) HDR2.95@52.5,9.7
VDRIVE: HDR1.20 U1.P4 | length 50
  MidLayer1 w0.127: 24.7,38.1 25.7,38.1
  MidLayer1 w0.2: v1(22.1,73) 21,71.9 21,64.9 15.7,59.6 15.7,58.5 15.1,57.9 15.1,56.4 18.1,53.4 18.1,44.5 24.5,38.1 24.7,38.1 ; 25.7,38.1 v1(26.2,38.6)
  Bottom Layer w0.2: HDR1.20@22.1,67.3 v1(22.1,73) ; v1(26.2,38.6) U1.P4@26.7,39.1
VREF: HDR1.91 R8.2 R9.1 | length 18.1
  Top Layer w0.3: R9.1@54.45,53 55.4,53 55.8,53.4 v1(55.8,55.8) R8.2@54.5,55.8
  Bottom Layer w0.2: HDR1.91@50.9,60.5 50.9,57.5 49.8,56.4 49.8,55.1 50.7,54.2 54.2,54.2 v1(55.8,55.8)
pads on no net: HDR1.MH1 HDR1.MH2 HDR1.MH3 HDR1.MH4 HDR1.MH5 HDR1.MH6 HDR2.MH1 HDR2.MH2 HDR2.MH3 HDR2.MH4 HDR2.MH5 HDR2.MH6 U1.A11 U1.A20 U1.AA11 U1.AB19 U1.AB21 U1.C11 U1.D11 U1.D12 U1.E9 U1.E11 U1.E18 U1.F5 U1.F9 U1.F10 U1.F11 U1.F12 U1.F13 U1.G5 U1.G18 U1.G20 U1.H3 U1.H5 U1.H18 U1.H19 U1.J3 U1.J4 U1.J5 U1.J6 U1.J17 U1.J18 U1.J19 U1.K5 U1.K6 U1.K17 U1.L5 U1.L6 U1.L17 U1.M5 U1.M6 U1.M17 U1.N5 U1.N6 U1.N17 U1.P5 U1.P6 U1.P17 U1.P18 U1.R5 U1.T5 U1.U5 U1.U9 U1.U10 U1.U12 U1.U13 U1.U14 U1.V5 U1.V6 U1.V7 U1.V8 U1.V10 U1.V12 U1.V13 U1.V14 U1.V15 U1.V16 U1.V17 U1.W5 U1.W8 U1.W11 U1.W13 U1.W16 U1.W17 U1.W18 U1.Y4 U1.Y5 U1.Y11 U1.Y13 U1.Y16 U1.Y17 U1.Y18 U2.1 U2.5 U2.9 U2.13 U2.16 U5.1
copper on no net: | length 8.2
  Bottom Layer w1: 55.9,45.9 55.9,54.1

## Polygon pours and split planes (outlines as drawn)
VCCINT on Top Layer "Top Layer-VCCINT" (solid, remove dead copper, pour order 1000): -3.2,83.8 72.8,83.8 72.8,-7.3 -5.3,-7.3 -5.3,84 -2.9,84
GND on MidLayer1 "MidLayer1-GND" (solid, remove dead copper, pour order 1001): -6.9,83.4 72.5,83.4 72.5,-3.3 -3.5,-3.3 -3.5,83.3
VCCINT on MidLayer2 "MidLayer2-VCCINT" (solid, remove dead copper, pour order 1002): -4.2,83 72.1,83 72.1,-5.2 -2.5,-5.2 -2.5,83
VCC on InternalPlane1 (split plane): 36.228,79.789 37.955,79.759 39.683,79.709 41.409,79.639 43.135,79.55 44.859,79.44 46.582,79.31 48.303,79.161 50.023,78.991 51.74,78.802 53.455,78.593 55.168,78.364 56.878,78.116 58.585,77.847 60.289,77.559 61.989,77.252 63.685,76.924 65.378,76.578 67.067,76.211 67.798,76.044 67.798,1.202 1.202,1.202 1.203,76.044 1.933,76.211 3.622,76.578 5.315,76.924 7.011,77.252 8.711,77.559 10.415,77.847 12.122,78.116 13.832,78.364 15.545,78.593 17.26,78.802 18.977,78.991 20.697,79.161 22.418,79.31 24.141,79.44 25.865,79.55 27.591,79.639 29.317,79.709 31.045,79.759 32.772,79.789 34.5,79.799
GND on InternalPlane2 (split plane): 36.228,79.789 37.955,79.759 39.683,79.709 41.409,79.639 43.135,79.55 44.859,79.44 46.582,79.31 48.303,79.161 50.023,78.991 51.74,78.802 53.455,78.593 55.168,78.364 56.878,78.116 58.585,77.847 60.289,77.559 61.989,77.252 63.685,76.924 65.378,76.578 67.067,76.211 67.798,76.044 67.798,1.202 1.202,1.202 1.203,76.044 1.933,76.211 3.622,76.578 5.315,76.924 7.011,77.252 8.711,77.559 10.415,77.847 12.122,78.116 13.832,78.364 15.545,78.593 17.26,78.802 18.977,78.991 20.697,79.161 22.418,79.31 24.141,79.44 25.865,79.55 27.591,79.639 29.317,79.709 31.045,79.759 32.772,79.789 34.5,79.799

## Keep-outs
Keep-Out Layer:
  lines w1.3: 0.001,77 cw(c34.5,-69.801) 68.999,77 ; 0.001,77 cw(c34.5,-69.801) 68.999,77 ; 0.001,77 cw(c34.5,-69.801) 68.999,77 ; 0.001,77 0,76.999 0,0 69,0 69,76.999 68.999,77

## Other copper
Top Layer:
  rectangle net GND: 53.1,17.7 54.4,18.9
Bottom Layer:
  rectangle net VBATT: 59,42.5 66.3,44.4
  rectangle net VBATT: 58.9,55.7 66.2,57.6
  rectangle net VCC: 30.3,68.6 31.1,69.6
  rectangle net GND: 28.5,69.3 29.6,70.4
  rectangle net VCC: 50.9,69.2 53.3,71.1

## Silkscreen, mask and mechanical layers (free items; w line width, h text height)
Top Overlay:
  circle w0.127: c65,4 r2.5
  circle w0.127: c4,34 r2.5
  circle w0.127: c60.8,13.1 r2.5
  circle w0.127: c65,73 r2.5
  lines w0.08: 1.1,36.6 1.4,30.9 ; 3.1,57.5 3.82,57.52 ; 5.95,28 6.5,27.7 ; 10.1,57.6 10.7,57.5 ; 13.6,20 13.8,19.3 ; 14.2,16.4 15.32,17.32 ; 14.3,25.8 15.8,24.4 ; 15.1,1.5 17.6,1.5 ; 19.7,49.1 20.5,48.4 ; 20.7,25.7 20.8,26 ; 21.8,56.1 22.2,55.6 ; 22.6,43.3 26.7,43.1 27.8,42.3 ; 22.9,28.8 23.22,29.12 ; 24.4,48 24.9,46.5 ; 24.5,38.4 28.7,38.2 ; 24.7,24.35 24.9,25.1 ; 24.9,7.9 24.9,8.4 ; 24.9,36 26.6,36.4 ; 25.2,35 28.7,35.1 ; 25.9,45.1 27.1,44.9 27.8,44.3 ; 26.2,1.6 26.8,1.6 ; 26.6,40.2 27.7,39.9 ; 26.713,33.22 27.6,33.5 ; 27.4,30.9 27.9,31 ; 28,7.3 28.2,8.6 ; 29.3,42.6 29.3,43.2 ; 30.5,20.8 31.42,20.12 ; 30.7,56.1 31.3,56.5 ; 31.5,27.2 31.9,31.1 ; 32,8.6 32.3,7.3 ; 32,48.5 32.02,47.78 ; 33.7,27.4 33.9,28.4 ; 34.3,31.2 35.5,28.4 ; 35.7,42.1 35.7,44.6 ; 36.6,31 36.8,31.3 ; 37.7,75.8 39.9,73.8 ; 38.6,44.3 38.9,44.6 38.9,45.1 ; 39.6,43.1 39.7,42.6 ; 39.7,35.2 43.72,35.12 ; 39.8,37.9 43.4,38.1 ; 40.7,31.6 41.92,32.12 ; 41.7,33.9 43.6,34.1 ; 41.8,40 43.5,40.1 ; 41.9,49.3 42.65,48.75 ; 42,70.5 42.02,68.48 ; 43,2.5 44.82,1.82 ; 44.9,74.7 44.9,75.1 ; 45.8,71.6 46.02,71.78 ; 47.92,9.12 48.1,6.8 ; 49,36.6 49.82,36.62 ; 49.8,44.7 50.6,44.5 ; 52.5,59.3 53.4,58.5 ; 54,6.8 54.5,7.1 ; 55.3,55.2 56.42,55.12 ; 56.3,77.1 56.9,77 ; 64.6,41.9 65.8,41.3
  text "+" at 64.6,55.9 h1.52
  text "-" at 59.5,49.3 h1.52
  text "+" at 62,45 h1.52
Bottom Overlay:
  drawing of 860 lines, arcs and shapes, not listed
  text "REV 1.10" at 46.6,76.4 h1.3
  text "NBP7" at 53.9,76.4 h1.3
  text "+" at 4.9,75.5 h1.52
  text "-" at 10.8,75.4 h1.52
  text "1" at 13.97,58.42 h1
  text "1" at 14.224,7.62 h1
PCB Boundary:
  lines w0.25: 0.001,77 cw(c34.5,-69.801) 69,77